# EAGLE board ponte_ampli_V1.3 (EAGLE 4.09)
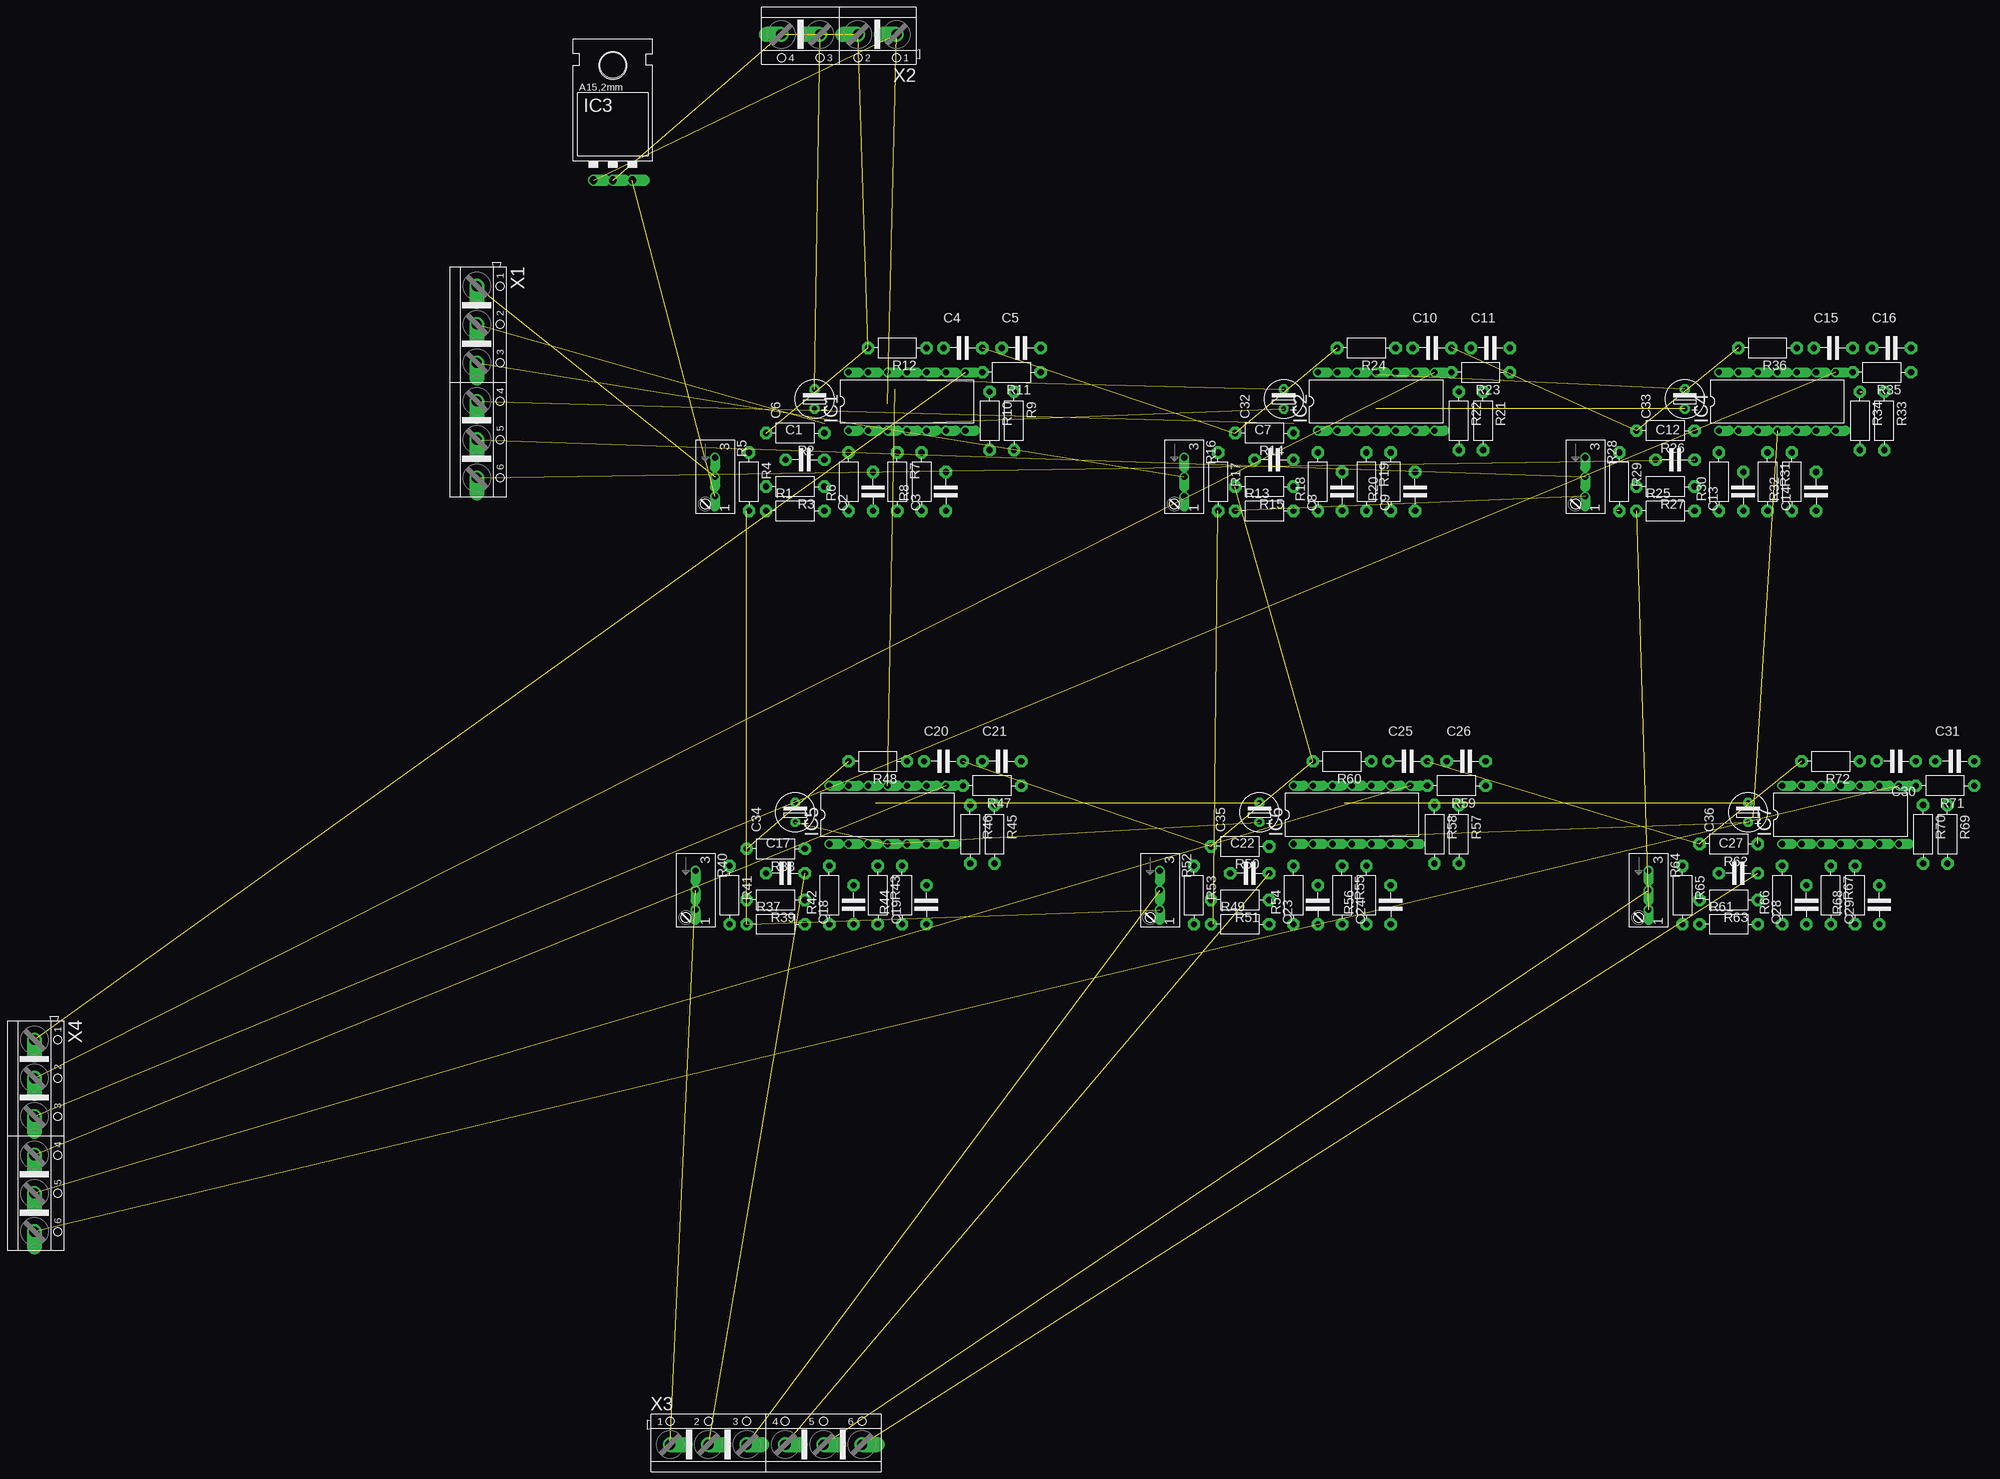
[diagram p0: board, top side]
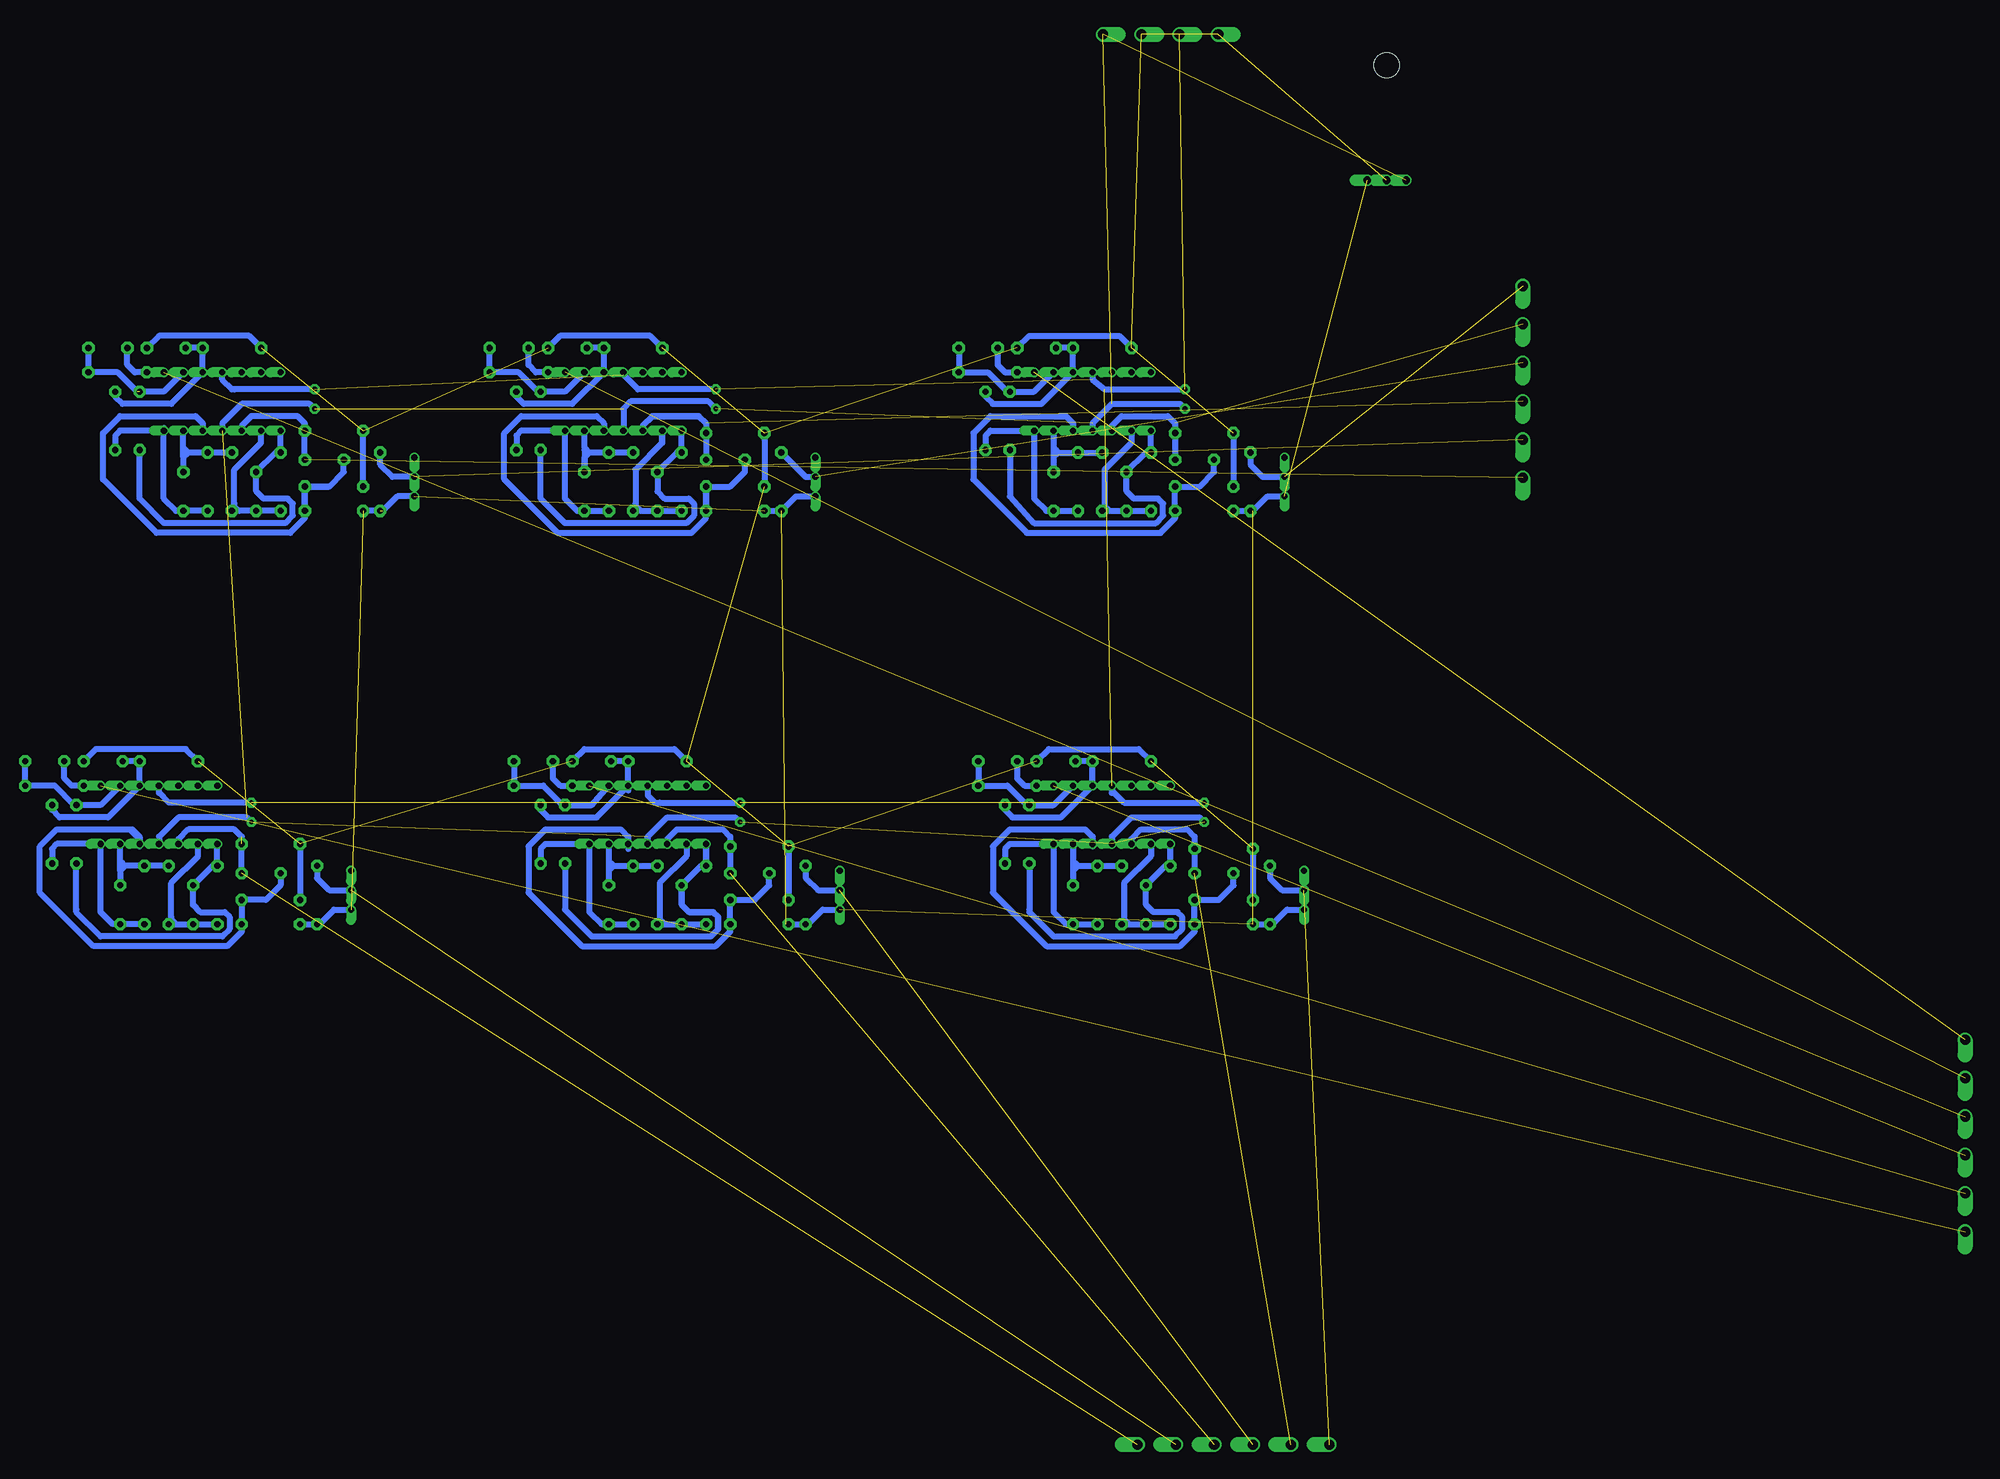
[diagram p1: board, bottom side, seen from below]

No outline drawn. Coordinates in mm, seen from the top.
Copper layers used: Bottom

## Footprints (pad centres in the part's own frame; a part is rotated, then mirrored left to right if it is on the bottom)
C-5 = drill 0.813 pad 1.6 octagon: 1 -2.54,0; 2 2.54,0
ES-2,5L = drill 0.61 pad 1.27 octagon: 1 0,0; 2 2.54,0
DIL14 = drill 0.813 offset: 1 -7.62,-3.81; 2 -5.08,-3.81; 3 -2.54,-3.81; 4 0,-3.81; 5 2.54,-3.81; 6 5.08,-3.81; 7 7.62,-3.81; 8 7.62,3.81; 9 5.08,3.81; 10 2.54,3.81; 11 0,3.81; 12 -2.54,3.81; 13 -5.08,3.81; 14 -7.62,3.81
78XXL = drill 1.016 offset: GND 0,-3.81; IN -2.54,-3.81; OUT 2.54,-3.81 | hole 3.302: 0,11.176
R-7,5 = drill 0.813 pad 1.6 octagon: 1 -3.81,0; 2 3.81,0
S64W = drill 0.813 offset: A 2.54,1.27; E -2.54,1.27; S 0,1.27
AK500/6 = drill 1.321 offset: 1 -12.522,0; 2 -7.518,0; 3 -2.515,0; 4 2.515,0; 5 7.518,0; 6 12.522,0
AK500/4 = drill 1.321 offset: 1 -7.518,0; 2 -2.489,0; 3 2.489,0; 4 7.518,0

## Placement (x,y rotation side)
C1  [C-5]  -44.77,-26.99 0 top
C2  [C-5]  -35.88,-31.11 90 top
C3  [C-5]  -26.35,-31.11 90 top
C4  [C-5]  -24.13,-12.38 0 top
C5  [C-5]  -16.51,-12.38 0 top
C6  [ES-2,5L]  -43.5,-20.32 90 top
C7  [C-5]  16.51,-26.99 0 top
C8  [C-5]  25.4,-31.11 90 top
C9  [C-5]  34.92,-31.11 90 top
C10  [C-5]  37.15,-12.38 0 top
C11  [C-5]  44.77,-12.38 0 top
C12  [C-5]  68.9,-26.99 0 top
C13  [C-5]  77.79,-31.11 90 top
C14  [C-5]  87.31,-31.11 90 top
C15  [C-5]  89.53,-12.38 0 top
C16  [C-5]  97.16,-12.38 0 top
C17  [C-5]  -47.31,-80.96 0 top
C18  [C-5]  -38.42,-85.09 90 top
C19  [C-5]  -28.89,-85.09 90 top
C20  [C-5]  -26.67,-66.36 0 top
C21  [C-5]  -19.05,-66.36 0 top
C22  [C-5]  13.34,-80.96 0 top
C23  [C-5]  22.23,-85.09 90 top
C24  [C-5]  31.75,-85.09 90 top
C25  [C-5]  33.97,-66.36 0 top
C26  [C-5]  41.59,-66.36 0 top
C27  [C-5]  77.15,-80.96 0 top
C28  [C-5]  86.04,-85.09 90 top
C29  [C-5]  95.57,-85.09 90 top
C30  [C-5]  97.79,-66.36 180 top
C31  [C-5]  105.41,-66.36 0 top
C32  [ES-2,5L]  17.78,-20.32 90 top
C33  [ES-2,5L]  70.17,-20.32 90 top
C34  [ES-2,5L]  -46.04,-74.3 90 top
C35  [ES-2,5L]  14.61,-74.3 90 top
C36  [ES-2,5L]  78.42,-74.3 90 top
IC1  TL084P  [DIL14]  -31.43,-19.37 0 top
IC2  TL084P  [DIL14]  29.84,-19.37 0 top
IC3  7805  [78XXL]  -69.85,13.34 0 top
IC4  TL084P  [DIL14]  82.23,-19.37 0 top
IC5  TL084P  [DIL14]  -33.97,-73.34 0 top
IC6  TL084P  [DIL14]  26.67,-73.34 0 top
IC7  TL084P  [DIL14]  90.49,-73.34 0 top
R1  [R-7,5]  -46.04,-33.66 0 top
R2  [R-7,5]  -46.04,-23.5 180 top
R3  [R-7,5]  -46.04,-30.48 180 top
R4  [R-7,5]  -52.07,-29.84 270 top
R5  [S64W]  -57.78,-29.21 270 top
R6  [R-7,5]  -39.05,-29.84 90 top
R7  [R-7,5]  -32.7,-29.84 270 top
R8  [R-7,5]  -29.53,-29.84 90 top
R9  [R-7,5]  -17.46,-21.91 270 top
R10  [R-7,5]  -20.64,-21.91 270 top
R11  [R-7,5]  -17.78,-15.56 180 top
R12  [R-7,5]  -32.7,-12.38 180 top
R13  [R-7,5]  15.24,-33.66 0 top
R14  [R-7,5]  15.24,-23.5 180 top
R15  [R-7,5]  15.24,-30.48 180 top
R16  [S64W]  3.49,-29.21 270 top
R17  [R-7,5]  9.21,-29.84 270 top
R18  [R-7,5]  22.23,-29.84 90 top
R19  [R-7,5]  28.57,-29.84 270 top
R20  [R-7,5]  31.75,-29.84 90 top
R21  [R-7,5]  43.81,-21.91 270 top
R22  [R-7,5]  40.64,-21.91 270 top
R23  [R-7,5]  43.5,-15.56 180 top
R24  [R-7,5]  28.57,-12.38 180 top
R25  [R-7,5]  67.63,-33.66 0 top
R26  [R-7,5]  67.63,-23.18 180 top
R27  [R-7,5]  67.63,-30.48 180 top
R28  [S64W]  55.88,-29.21 270 top
R29  [R-7,5]  61.59,-29.84 270 top
R30  [R-7,5]  74.61,-29.84 90 top
R31  [R-7,5]  80.96,-29.84 270 top
R32  [R-7,5]  84.14,-29.84 90 top
R33  [R-7,5]  96.2,-21.91 270 top
R34  [R-7,5]  93.03,-21.91 270 top
R35  [R-7,5]  95.89,-15.56 180 top
R36  [R-7,5]  80.96,-12.38 180 top
R37  [R-7,5]  -48.58,-87.63 0 top
R38  [R-7,5]  -48.58,-77.79 180 top
R39  [R-7,5]  -48.58,-84.45 180 top
R40  [S64W]  -60.33,-83.19 270 top
R41  [R-7,5]  -54.61,-83.82 270 top
R42  [R-7,5]  -41.59,-83.82 90 top
R43  [R-7,5]  -35.24,-83.82 270 top
R44  [R-7,5]  -32.07,-83.82 90 top
R45  [R-7,5]  -20,-75.88 270 top
R46  [R-7,5]  -23.18,-75.88 270 top
R47  [R-7,5]  -20.32,-69.53 180 top
R48  [R-7,5]  -35.24,-66.36 180 top
R49  [R-7,5]  12.06,-87.63 0 top
R50  [R-7,5]  12.06,-77.47 180 top
R51  [R-7,5]  12.06,-84.45 180 top
R52  [S64W]  0.32,-83.19 270 top
R53  [R-7,5]  6.03,-83.82 270 top
R54  [R-7,5]  19.05,-83.82 90 top
R55  [R-7,5]  25.4,-83.82 270 top
R56  [R-7,5]  28.57,-83.82 90 top
R57  [R-7,5]  40.64,-75.88 270 top
R58  [R-7,5]  37.47,-75.88 270 top
R59  [R-7,5]  40.32,-69.53 180 top
R60  [R-7,5]  25.4,-66.36 180 top
R61  [R-7,5]  75.88,-87.63 0 top
R62  [R-7,5]  75.88,-77.15 180 top
R63  [R-7,5]  75.88,-84.45 180 top
R64  [S64W]  64.14,-83.19 270 top
R65  [R-7,5]  69.85,-83.82 270 top
R66  [R-7,5]  82.87,-83.82 90 top
R67  [R-7,5]  89.22,-83.82 270 top
R68  [R-7,5]  92.39,-83.82 90 top
R69  [R-7,5]  104.46,-75.88 270 top
R70  [R-7,5]  101.28,-75.88 270 top
R71  [R-7,5]  104.14,-69.53 180 top
R72  [R-7,5]  89.22,-66.36 180 top
X1  [AK500/6]  -87.63,-16.83 270 top
X2  [AK500/4]  -40.32,28.57 180 top
X3  [AK500/6]  -49.85,-155.57 0 top
X4  [AK500/6]  -145.41,-115.25 270 top

## Library data of the parts
C1-C36 R1-R4 R6-R15 R17-R27 R29-R39 R41-R51 R53-R63 R65-R72 = discrete
IC1 IC2 IC4-IC7 = linear
IC3 = v-reg
R5 R16 R28 R40 R52 R64 = pot
X1-X4 = con-ptr500

## Nets
+5V: IC3.OUT R1.1 R4.2 R5.A R13.1 R16.A R17.2 R25.1 R28.A R29.2 R37.1 R40.A R41.2 R49.1 R52.A R53.2 R61.1 R64.A R65.2
+12V: C6.1 C32.1 C33.1 C34.1 C35.1 C36.1 IC1.4 IC2.4 IC3.IN IC4.4 IC5.4 IC6.4 IC7.4 X2.1
-12V: C6.2 C32.2 C33.2 C34.2 C35.2 C36.2 IC1.11 IC2.11 IC4.11 IC5.11 IC6.11 IC7.11 X2.3
N$1: C1.1 IC1.5 R1.2 R3.1
N$2: C1.2 IC1.3 R2.1 X1.2
N$3: C5.2 IC1.9 R10.1 R11.1
N$4: C2.2 IC1.1 R6.2 R10.2
N$5: R4.1 R5.S X1.1
N$6: C4.1 IC1.10 R9.1 R12.1
N$7: C2.1 IC1.2 R6.1 R7.2
N$8: C11.1 IC2.8 R23.2 X4.2
N$9: C3.1 IC1.7 R8.1 R9.2
N$10: C7.1 IC2.5 R13.2 R15.1
N$11: C7.2 IC2.3 R14.1 X1.4
N$12: R16.S R17.1 X1.3
N$13: C8.2 IC2.1 R18.2 R22.2
N$14: C8.1 IC2.2 R18.1 R19.2
N$15: C3.2 IC1.6 R7.1 R8.2
N$16: C9.1 IC2.7 R20.1 R21.2
N$17: C11.2 IC2.9 R22.1 R23.1
N$18: C10.1 IC2.10 R21.1 R24.1
N$19: C9.2 IC2.6 R19.1 R20.2
N$20: C12.1 IC4.5 R25.2 R27.1
N$21: C12.2 IC4.3 R26.1 X1.6
N$22: R28.S R29.1 X1.5
N$23: C13.2 IC4.1 R30.2 R34.2
N$24: C13.1 IC4.2 R30.1 R31.2
N$25: C14.1 IC4.7 R32.1 R33.2
N$26: C16.2 IC4.9 R34.1 R35.1
N$27: C15.1 IC4.10 R33.1 R36.1
N$28: C14.2 IC4.6 R31.1 R32.2
N$29: C17.1 IC5.5 R37.2 R39.1
N$30: C17.2 IC5.3 R38.1 X3.2
N$31: R40.S R41.1 X3.1
N$32: C18.2 IC5.1 R42.2 R46.2
N$33: C18.1 IC5.2 R42.1 R43.2
N$34: C19.1 IC5.7 R44.1 R45.2
N$35: C21.2 IC5.9 R46.1 R47.1
N$36: C20.1 IC5.10 R45.1 R48.1
N$37: C19.2 IC5.6 R43.1 R44.2
N$38: C22.1 IC6.5 R49.2 R51.1
N$39: C22.2 IC6.3 R50.1 X3.4
N$40: R52.S R53.1 X3.3
N$41: C23.2 IC6.1 R54.2 R58.2
N$42: C23.1 IC6.2 R54.1 R55.2
N$43: C24.1 IC6.7 R56.1 R57.2
N$44: C26.2 IC6.9 R58.1 R59.1
N$45: C25.1 IC6.10 R57.1 R60.1
N$46: C24.2 IC6.6 R55.1 R56.2
N$47: C27.1 IC7.5 R61.2 R63.1
N$48: C27.2 IC7.3 R62.1 X3.6
N$49: R64.S R65.1 X3.5
N$50: C28.2 IC7.1 R66.2 R70.2
N$51: C28.1 IC7.2 R66.1 R67.2
N$52: C29.1 IC7.7 R68.1 R69.2
N$53: C31.2 IC7.9 R70.1 R71.1
N$54: C30.2 IC7.10 R69.1 R72.1
N$55: C29.2 IC7.6 R67.1 R68.2
N$56: C16.1 IC4.8 R35.2 X4.3
N$57: C5.1 IC1.8 R11.2 X4.1
N$58: C31.1 IC7.8 R71.2 X4.6
N$59: C26.1 IC6.8 R59.2 X4.5
N$60: C21.1 IC5.8 R47.2 X4.4
PE: C4.2 C10.2 C15.2 C20.2 C25.2 C30.1 IC3.GND R2.2 R3.2 R12.2 R14.2 R15.2 R24.2 R26.2 R27.2 R36.2 R38.2 R39.2 R48.2 R50.2 R51.2 R60.2 R62.2 R63.2 R72.2 X2.2 X2.4

## Tracks (layer width: path | path; a pad name or v marks a point on that pad's centre or on a via)
+5V  (7 unrouted)
  Bottom 0.813: R1.1 R4.2 -52.39,-33.66 -54.29,-31.75 R5.A | R16.A 7.3,-31.75 R17.2 R13.1 | R28.A 59.37,-31.75 61.28,-33.66 | R29.2 R25.1 | R37.1 R41.2 -54.93,-87.63 -56.83,-85.72 R40.A | R52.A 3.81,-85.72 5.71,-87.63 R53.2 R49.1 8.57,-87.63 | R64.A 67.63,-85.72 69.53,-87.63 R65.2 R61.1
+5V1
  Bottom 0.813: 4.76,-31.75 7.3,-31.75 9.21,-33.66 11.43,-33.66
+5V2
  Bottom 0.813: 63.82,-33.66 61.28,-33.66 59.37,-31.75 57.15,-31.75
+5V3
  Bottom 0.813: -52.39,-87.63 -54.61,-87.63 -54.93,-87.63 -56.83,-85.72 -59.05,-85.72
+5V4
  Bottom 0.813: 8.26,-87.63 5.71,-87.63 3.81,-85.72 1.59,-85.72
+5V5
  Bottom 0.813: 72.07,-87.63 69.53,-87.63 67.63,-85.72 65.41,-85.72
+12V  (8 unrouted)
  Bottom 0.813: IC1.4 -31.43,-22.23 -33.97,-19.68 -42.86,-19.68 C6.1 | C32.1 18.73,-19.37 28.89,-19.37 29.84,-20.32 IC2.4 | C33.1 70.8,-19.68 79.69,-19.68 82.23,-22.23 IC4.4 | IC7.4 90.49,-76.2 87.95,-73.66 79.06,-73.66 C36.1 | IC6.4 26.67,-76.2 24.13,-73.66 15.24,-73.66 C35.1
+12V2
  Bottom 0.813: 82.23,-23.18 82.23,-22.23 79.69,-19.68 70.8,-19.68 70.17,-20.32
+12V3
  Bottom 0.813: -33.97,-77.15 -33.97,-76.2 -36.51,-73.66 -45.4,-73.66 -46.04,-74.3
+12V4
  Bottom 0.813: 26.67,-77.15 26.67,-76.2 24.13,-73.66 15.24,-73.66 14.61,-74.3
+12V5
  Bottom 0.813: 90.49,-77.15 90.49,-76.2 87.95,-73.66 79.06,-73.66 78.42,-74.3
-12V  (6 unrouted)
  Bottom 0.813: C6.2 -33.02,-17.78 -31.43,-16.51 IC1.11 | IC2.11 29.84,-15.88 27.94,-17.78 C32.2 | C33.2 80.96,-17.78 82.23,-16.51 IC4.11 | IC7.11 90.49,-70.48 89.22,-71.75 C36.2 | C34.2 -35.56,-71.75 -33.97,-70.17 IC5.11 | C35.2 25.72,-71.75 26.67,-70.8 IC6.11
-12V2
  Bottom 0.813: 70.17,-17.78 80.64,-17.78
-12V3
  Bottom 0.813: -35.56,-71.75 -46.04,-71.75
-12V4
  Bottom 0.813: 25.08,-71.75 14.61,-71.75
-12V5
  Bottom 0.813: 78.42,-71.75 88.9,-71.75
N$1
  Bottom 0.813: IC1.5 -28.89,-22.23 -27.94,-21.27 -18.1,-21.27 -15.88,-23.5 -15.88,-29.53 -22.86,-36.51 -40.32,-36.51 -42.23,-34.61 R1.2 R3.1 -45.4,-30.48 -47.31,-28.57 C1.1
N$2  (1 unrouted)
  Bottom 0.813: C1.2 R2.1 -42.23,-22.23 -41.27,-21.27 -35.24,-21.27 -33.97,-22.54 IC1.3
N$3
  Bottom 0.813: C5.2 R11.1 -17.78,-15.56 -20.32,-18.1 R10.1 -23.81,-18.1 IC1.9
N$4
  Bottom 0.813: R6.2 -39.05,-26.35 | R6.2 IC1.1 | R6.2 -38.42,-26.04 C2.2 -35.88,-31.11 -36.83,-32.07 -40.01,-32.07 -40.64,-32.7 -40.64,-34.29 -39.69,-35.24 -23.81,-35.24 -20.64,-31.75 R10.2
N$5  (1 unrouted)
  Bottom 0.813: R4.1 -52.07,-27.62 -53.66,-29.21 R5.S
N$6
  Bottom 0.813: C4.1 R12.1 IC1.10 -24.77,-19.68 -18.41,-19.68 -17.46,-18.73 R9.1
N$7
  Bottom 0.813: R6.1 C2.1 -33.66,-33.66 | IC1.2 -36.51,-24.77 -33.02,-28.26 -33.02,-32.7 | -33.02,-32.7 -33.02,-33.34 R7.2 -33.66,-33.66 | -33.02,-32.7 -33.02,-33.02 -33.66,-33.66
N$8  (1 unrouted)
  Bottom 0.813: R23.2 IC2.8 R23.2 | C11.1 42.23,-14.61 41.27,-15.56 R23.2
N$9
  Bottom 0.813: R8.1 C3.1 -25.4,-33.66 -23.81,-32.07 IC1.7 -18.1,-23.18 -17.46,-23.81 R9.2
N$10
  Bottom 0.813: R15.1 R13.2 | R15.1 15.88,-30.48 13.97,-28.57 C7.1 | R15.1 19.05,-34.61 20.95,-36.51 38.42,-36.51 45.4,-29.53 45.4,-23.5 43.18,-21.27 33.34,-21.27 32.38,-22.23 IC2.5
N$11  (1 unrouted)
  Bottom 0.813: C7.2 R14.1 19.05,-22.23 20,-21.27 26.04,-21.27 27.3,-22.54 IC2.3
N$12  (1 unrouted)
  Bottom 0.813: R16.S 6.03,-29.21 R17.1
N$13
  Bottom 0.813: IC2.1 R18.2 22.86,-26.04 C8.2 25.4,-31.11 24.45,-32.07 21.27,-32.07 20.64,-32.7 20.64,-34.29 21.59,-35.24 26.67,-35.24 26.99,-35.24 37.47,-35.24 40.64,-32.07 R22.2
N$14
  Bottom 0.813: R18.1 C8.1 25.72,-33.66 27.62,-33.66 | 27.62,-33.66 28.26,-33.02 28.26,-28.26 24.77,-24.77 IC2.2 | 27.62,-33.66 R19.2
N$15
  Bottom 0.813: R7.1 R8.2 -26.99,-26.04 | IC1.6 -26.35,-25.4 | -26.35,-26.67 C3.2 | -26.35,-26.67 -26.99,-26.04 | -26.35,-25.4 -26.35,-26.67 | -26.35,-25.4 -26.35,-25.72 -26.67,-26.04 -26.67,-25.72 -26.35,-25.4 | -26.35,-25.4 -26.99,-26.04
N$16
  Bottom 0.813: C9.1 R20.1 C9.1 | C9.1 35.88,-33.66 37.47,-32.07 IC2.7 43.18,-23.18 43.81,-23.81 R21.2
N$17
  Bottom 0.813: IC2.9 37.47,-18.1 R22.1 40.96,-18.1 43.5,-15.56 R23.1 C11.2
N$18
  Bottom 0.813: R21.1 43.81,-18.73 42.86,-19.68 36.51,-19.68 IC2.10 R24.1 | R24.1 C10.1 R24.1
N$19
  Bottom 0.813: R19.1 R20.2 34.29,-26.04 34.92,-25.4 | 34.92,-25.4 IC2.6 | 34.92,-25.4 C9.2
N$20
  Bottom 0.813: C12.1 66.36,-28.57 68.26,-30.48 R27.1 | R27.1 R25.2 | R27.1 71.44,-34.61 73.34,-36.51 90.81,-36.51 97.79,-29.53 97.79,-23.5 95.57,-21.27 85.72,-21.27 84.77,-22.23 IC4.5
N$21  (1 unrouted)
  Bottom 0.813: R26.1 C12.2 R26.1 | R26.1 71.44,-22.23 72.39,-21.27 78.42,-21.27 79.69,-22.54 IC4.3
N$22  (1 unrouted)
  Bottom 0.813: R28.S 60.01,-29.21 61.59,-27.62 R29.1
N$23
  Bottom 0.813: IC4.1 R30.2 75.25,-26.04 C13.2 77.79,-31.11 76.83,-32.07 73.66,-32.07 73.03,-32.7 73.03,-34.29 73.98,-35.24 89.85,-35.24 93.03,-32.07 R34.2
N$24
  Bottom 0.813: R30.1 C13.1 80.01,-33.66 80.64,-33.02 | 80.64,-33.02 80.64,-28.26 77.15,-24.77 IC4.2 | 80.64,-33.02 80.64,-33.34 R31.2
N$25
  Bottom 0.813: IC4.7 89.85,-22.86 | IC4.7 89.85,-32.07 88.27,-33.66 C14.1 R32.1 | IC4.7 95.57,-23.18 96.2,-23.81 R33.2
N$26  (1 unrouted)
  Bottom 0.813: C16.2 R35.1 95.89,-15.56 93.34,-18.1 89.85,-18.1 IC4.9
N$27
  Bottom 0.813: C15.1 R36.1 IC4.10 88.9,-19.68 95.25,-19.68 96.2,-18.73 R33.1
N$28
  Bottom 0.813: 87.31,-26.67 IC4.6 | R31.1 R32.2 86.36,-26.04 86.68,-26.04 87.31,-26.67 | 87.31,-26.67 C14.2
N$29
  Bottom 0.813: C17.1 -49.85,-82.55 -47.94,-84.45 R39.1 R37.2 -44.77,-88.58 -42.86,-90.49 -25.4,-90.49 -18.41,-83.5 -18.41,-77.47 -20.64,-75.25 -30.48,-75.25 -31.43,-76.2 IC5.5 -31.43,-77.47
N$30  (1 unrouted)
  Bottom 0.813: C17.2 R38.1 -44.77,-76.2 -43.81,-75.25 -37.78,-75.25 -36.51,-76.52 IC5.3
N$31  (1 unrouted)
  Bottom 0.813: R40.S -56.2,-83.19 -54.61,-81.6 R41.1
N$32
  Bottom 0.813: IC5.1 R42.2 -40.96,-80.01 C18.2 -38.42,-85.09 -39.37,-86.04 -42.55,-86.04 -43.18,-86.68 -43.18,-88.27 -42.23,-89.22 -26.35,-89.22 -23.18,-86.04 R46.2
N$33
  Bottom 0.813: C18.1 R42.1 C18.1 | -35.56,-87.63 -35.56,-82.23 -39.05,-78.74 IC5.2 -39.05,-76.83 | -35.56,-87.63 R43.2 | C18.1 -38.1,-87.63 -35.56,-87.63
N$34
  Bottom 0.813: R44.1 C19.1 -28.26,-87.63 -27.94,-87.63 -26.35,-86.04 IC5.7 -20.64,-77.15 -20,-77.79 R45.2
N$35
  Bottom 0.813: -23.5,-72.07 R46.1 | -23.5,-72.07 -22.86,-72.07 -20.32,-69.53 R47.1 C21.2 | -23.5,-72.07 -26.35,-72.07 IC5.9
N$36
  Bottom 0.813: R45.1 -20,-72.71 -20.95,-73.66 -27.3,-73.66 IC5.10 R48.1 C20.1
N$37
  Bottom 0.813: -29.21,-80.01 R44.2 | R44.2 R43.1 R44.2 | -29.21,-80.01 -29.21,-79.69 -28.89,-79.38 IC5.6 | C19.2 -28.89,-80.33 -29.21,-80.01
N$38
  Bottom 0.813: C22.1 10.79,-82.55 12.7,-84.45 R51.1 R49.2 15.88,-88.58 17.78,-90.49 35.24,-90.49 42.23,-83.5 42.23,-77.47 40.01,-75.25 30.16,-75.25 29.21,-76.2 IC6.5 29.21,-77.79
N$39  (1 unrouted)
  Bottom 0.813: IC6.3 24.13,-76.52 22.86,-75.25 16.83,-75.25 15.88,-76.2 R50.1 C22.2
N$40  (1 unrouted)
  Bottom 0.813: R52.S 4.45,-83.19 6.03,-81.6 R53.1
N$41
  Bottom 0.813: IC6.1 R54.2 19.68,-80.01 C23.2 22.23,-85.09 21.27,-86.04 18.1,-86.04 17.46,-86.68 17.46,-88.27 18.41,-89.22 33.97,-89.22 37.47,-85.72 R58.2
N$42
  Bottom 0.813: IC6.2 21.59,-78.74 25.08,-82.23 25.08,-87.63 | R54.1 C23.1 25.08,-87.63 | 25.08,-87.63 R55.2
N$43
  Bottom 0.813: R56.1 C24.1 32.7,-87.63 34.29,-86.04 IC6.7 40.01,-77.15 40.64,-77.79 R57.2
N$44
  Bottom 0.813: IC6.9 33.97,-72.07 R58.1 37.78,-72.07 40.32,-69.53 R59.1 C26.2
N$45
  Bottom 0.813: R57.1 40.64,-72.71 39.69,-73.66 33.34,-73.66 IC6.10 | IC6.10 29.21,-70.17 | IC6.10 R60.1 C25.1
N$46
  Bottom 0.813: R55.1 R56.2 31.43,-80.01 | 31.43,-80.01 31.75,-79.69 IC6.6 | 31.43,-80.01 31.75,-80.33 C24.2
N$47
  Bottom 0.813: R63.1 R61.2 | R63.1 76.52,-84.45 74.61,-82.55 C27.1 | R63.1 79.69,-88.58 81.6,-90.49 99.06,-90.49 106.05,-83.5 106.05,-77.47 103.82,-75.25 94.3,-75.25 93.03,-76.52 IC7.5 93.03,-77.47
N$48  (2 unrouted)
  Bottom 0.813: C27.2 79.69,-76.2 80.64,-75.25 86.68,-75.25 87.95,-76.52 IC7.3
N$49  (1 unrouted)
  Bottom 0.813: R65.1 69.85,-81.6 68.26,-83.19 R64.S
N$50
  Bottom 0.813: IC7.1 R66.2 83.5,-80.01 C28.2 86.04,-85.09 85.09,-86.04 81.92,-86.04 81.28,-86.68 81.28,-88.27 82.23,-89.22 98.11,-89.22 101.28,-86.04 R70.2
N$51
  Bottom 0.813: C28.1 R66.1 C28.1 | 88.27,-87.63 88.9,-87 88.9,-82.23 85.41,-78.74 IC7.2 | 88.27,-87.63 C28.1 | 88.27,-87.63 88.58,-87.63 R67.2
N$52
  Bottom 0.813: R68.1 C29.1 96.2,-87.63 96.52,-87.63 98.11,-86.04 IC7.7 103.82,-77.15 104.46,-77.79 R69.2
N$53
  Bottom 0.813: IC7.9 98.11,-72.07 R70.1 101.6,-72.07 104.14,-69.53 R71.1 C31.2
N$54
  Bottom 0.813: R69.1 104.46,-72.71 103.5,-73.66 97.16,-73.66 IC7.10 R72.1 C30.2
N$55
  Bottom 0.813: R67.1 R68.2 95.25,-80.01 | 95.25,-80.01 95.25,-79.69 95.57,-79.38 IC7.6 | C29.2 95.57,-80.33 95.25,-80.01
N$56  (1 unrouted)
  Bottom 0.813: IC4.8 R35.2 | C16.1 94.61,-14.61 93.66,-15.56 R35.2 | IC4.8 R35.2 | IC4.8 R35.2
N$57  (1 unrouted)
  Bottom 0.813: IC1.8 R11.2 -20,-15.56 -19.05,-14.61 C5.1
N$58  (1 unrouted)
  Bottom 0.813: IC7.8 R71.2 101.92,-69.53 102.87,-68.58 C31.1
N$59  (1 unrouted)
  Bottom 0.813: R59.2 IC6.8 R59.2 | C26.1 39.05,-68.58 38.1,-69.53 R59.2
N$60  (1 unrouted)
  Bottom 0.813: IC5.8 R47.2 -22.54,-69.53 -21.59,-68.58 C21.1
N$61
  Bottom 0.813: 32.38,-23.18 32.38,-22.23 33.34,-21.27 43.18,-21.27 45.4,-23.5 45.4,-29.53 38.42,-36.51 20.95,-36.51 19.05,-34.61 19.05,-30.48
N$62
  Bottom 0.813: 27.3,-23.18 27.3,-22.54 26.04,-21.27 20,-21.27 19.05,-22.23 19.05,-26.99
N$64
  Bottom 0.813: 20.64,-32.7 20.64,-34.29 21.59,-35.24
N$65
  Bottom 0.813: 27.62,-33.66 22.23,-33.66 | 27.62,-33.66 28.57,-33.66 28.26,-33.34 28.26,-32.7 | 27.62,-33.66 28.26,-33.02 28.26,-32.7 | 28.26,-28.26 28.26,-32.7
N$66
  Bottom 0.813: 31.75,-33.66 35.88,-33.66 37.47,-32.07 37.47,-23.18 43.18,-23.18 43.81,-23.81 43.81,-25.72
N$67
  Bottom 0.813: 24.77,-24.77 24.77,-23.18
N$68
  Bottom 0.813: 34.61,-12.38 32.38,-12.38 32.38,-15.56 36.51,-19.68 42.86,-19.68 43.81,-18.73 43.81,-18.1
N$69
  Bottom 0.813: 34.92,-25.4 34.92,-23.18 | 34.92,-28.57 34.92,-26.67 34.29,-26.04 34.92,-25.4 | 34.92,-25.4 34.92,-25.72 34.61,-26.04 34.61,-25.72 34.92,-25.4
N$70
  Bottom 0.813: 82.23,-16.51 82.23,-15.56
N$71
  Bottom 0.813: 84.77,-23.18 84.77,-22.23 85.72,-21.27 95.57,-21.27 97.79,-23.5 97.79,-29.53 90.81,-36.51 73.34,-36.51 71.44,-34.61 71.44,-30.48 68.26,-30.48 66.36,-28.57 66.36,-26.99
N$72
  Bottom 0.813: 79.69,-23.18 79.69,-22.54 78.42,-21.27 72.39,-21.27 71.44,-22.23 71.44,-26.99
N$73
  Bottom 0.813: 61.59,-26.04 61.59,-27.62 60.01,-29.21 57.15,-29.21
N$74
  Bottom 0.813: 74.61,-26.04 74.61,-26.35 | 74.61,-26.04 74.61,-23.18 | 74.61,-26.04 75.25,-26.04 77.79,-28.57 77.79,-31.11 76.83,-32.07 73.66,-32.07 73.03,-32.7 73.03,-34.29 73.98,-35.24 89.85,-35.24
N$75
  Bottom 0.813: 77.15,-23.18 77.15,-24.77 80.64,-28.26 80.64,-32.7 | 80.64,-32.7 80.64,-33.34 80.96,-33.66 80.01,-33.66 | 74.61,-33.66 80.01,-33.66 | 80.64,-32.7 80.64,-33.02 80.01,-33.66
N$76
  Bottom 0.813: 84.14,-33.66 88.27,-33.66 89.85,-32.07 89.85,-23.18 95.57,-23.18 96.2,-23.81 96.2,-25.72
N$77
  Bottom 0.813: 99.69,-12.38 99.69,-15.56 95.89,-15.56 93.34,-18.1 89.85,-18.1 87.31,-15.56
N$78
  Bottom 0.813: 87,-12.38 84.77,-12.38 84.77,-15.56 88.9,-19.68 95.25,-19.68 96.2,-18.73 96.2,-18.1
N$79
  Bottom 0.813: 87.31,-25.4 87.31,-23.18 | 87.31,-26.67 87.31,-28.57 | 80.96,-26.04 86.68,-26.04 | 86.68,-26.04 87.31,-26.67 | 87.31,-26.67 87.31,-25.4 | 87.31,-25.4 87.31,-25.72 87,-26.04 87,-25.72 87.31,-25.4 | 86.68,-26.04 87.31,-25.4
N$80
  Bottom 0.813: 94.61,-12.38 94.61,-14.61 93.66,-15.56 89.85,-15.56
N$81
  Bottom 0.813: -31.43,-77.15 -31.43,-76.2 -30.48,-75.25 -20.64,-75.25 -18.41,-77.47 -18.41,-83.5 -25.4,-90.49 -42.86,-90.49 -44.77,-88.58 -44.77,-87.63 -44.77,-84.45 -47.94,-84.45 -49.85,-82.55 -49.85,-80.96
N$82
  Bottom 0.813: -44.77,-80.96 -44.77,-77.79 -44.77,-76.2 -43.81,-75.25 -37.78,-75.25 -36.51,-76.52 -36.51,-77.15
N$83
  Bottom 0.813: -54.61,-80.01 -54.61,-81.6 -56.2,-83.19 -59.05,-83.19
N$84
  Bottom 0.813: -41.59,-80.01 -41.59,-80.33 | -41.59,-80.01 -41.59,-77.15 | -41.59,-80.01 -40.96,-80.01 -38.42,-82.55 -38.42,-85.09 -39.37,-86.04 -42.55,-86.04 -43.18,-86.68 -43.18,-88.27 -42.23,-89.22 -26.35,-89.22
N$85
  Bottom 0.813: -41.59,-87.63 -38.42,-87.63 -36.2,-87.63 | -39.05,-77.15 -39.05,-78.74 -35.56,-82.23 -35.56,-86.68 | -35.56,-86.68 -35.56,-87.31 -35.24,-87.63 -36.2,-87.63 | -35.56,-86.68 -35.56,-87 -36.2,-87.63
N$86
  Bottom 0.813: -32.07,-87.63 -28.89,-87.63 -27.94,-87.63 -26.35,-86.04 -26.35,-77.15 -20.64,-77.15 -20,-77.79 -20,-79.69
N$87
  Bottom 0.813: -16.51,-66.36 -16.51,-69.53 -20.32,-69.53 -22.86,-72.07 -23.18,-72.07 -26.35,-72.07 -28.89,-69.53
N$88
  Bottom 0.813: -29.21,-66.36 -31.43,-66.36 -31.43,-69.53 -27.3,-73.66 -20.95,-73.66 -20,-72.71 -20,-72.07
N$89
  Bottom 0.813: -35.24,-80.01 -32.07,-80.01 -29.53,-80.01 | -28.89,-77.15 -28.89,-79.38 | -28.89,-80.64 -28.89,-82.55 | -28.89,-80.64 -29.53,-80.01 | -28.89,-79.38 -28.89,-80.64 | -28.89,-79.38 -28.89,-79.69 -29.21,-80.01 -29.21,-79.69 -28.89,-79.38 | -28.89,-79.38 -29.53,-80.01
N$90
  Bottom 0.813: -26.35,-69.53 -24.13,-69.53 -22.54,-69.53 -21.59,-68.58 -21.59,-66.36
N$91
  Bottom 0.813: 29.21,-77.15 29.21,-76.2 30.16,-75.25 40.01,-75.25 42.23,-77.47 42.23,-83.5 35.24,-90.49 17.78,-90.49 15.88,-88.58 15.88,-84.45 12.7,-84.45 10.79,-82.55 10.79,-80.96
N$92
  Bottom 0.813: 24.13,-77.15 24.13,-76.52 22.86,-75.25 16.83,-75.25 15.88,-76.2 15.88,-80.96
N$93
  Bottom 0.813: 6.03,-80.01 6.03,-81.6 4.45,-83.19 1.59,-83.19
N$94
  Bottom 0.813: 19.05,-80.01 19.05,-80.33 | 19.05,-77.15 19.05,-80.01 | 19.05,-80.01 19.68,-80.01 22.23,-82.55 22.23,-85.09 21.27,-86.04 18.1,-86.04 17.46,-86.68 17.46,-88.27 18.41,-89.22
N$95
  Bottom 0.813: 21.59,-77.15 21.59,-78.74 25.08,-82.23 25.08,-86.68 | 25.08,-86.68 25.08,-87.31 25.4,-87.63 24.45,-87.63 | 24.45,-87.63 19.05,-87.63 | 25.08,-86.68 25.08,-87 24.45,-87.63
N$96
  Bottom 0.813: 34.29,-86.04 34.29,-77.15 40.01,-77.15 40.64,-77.79 40.64,-79.69
N$97
  Bottom 0.813: 44.13,-66.36 44.13,-69.53 40.32,-69.53 37.78,-72.07 34.29,-72.07
N$98
  Bottom 0.813: 31.43,-66.36 29.21,-66.36 29.21,-69.53 33.34,-73.66 39.69,-73.66 40.64,-72.71 40.64,-72.07
N$99
  Bottom 0.813: 31.75,-77.15 31.75,-79.38 | 31.75,-80.64 31.75,-82.55 | 31.11,-80.01 25.4,-80.01 | 31.75,-80.64 31.11,-80.01 | 31.75,-79.38 31.75,-80.64 | 31.75,-79.38 31.75,-79.69 31.43,-80.01 31.43,-79.69 31.75,-79.38 | 31.75,-79.38 31.11,-80.01
N$100
  Bottom 0.813: 39.05,-66.36 39.05,-68.58 38.1,-69.53 34.29,-69.53
N$101
  Bottom 0.813: 93.03,-77.15 93.03,-76.2 93.98,-75.25 103.82,-75.25 106.05,-77.47 106.05,-83.5 99.06,-90.49 81.6,-90.49 79.69,-88.58 79.69,-84.45 76.52,-84.45 74.61,-82.55 74.61,-80.96
N$102
  Bottom 0.813: 87.95,-77.15 87.95,-76.52 86.68,-75.25 80.64,-75.25 79.69,-76.2 79.69,-80.96
N$103
  Bottom 0.813: 69.85,-80.01 69.85,-81.6 68.26,-83.19 65.41,-83.19
N$104
  Bottom 0.813: 82.87,-80.01 82.87,-80.33 | 82.87,-80.01 82.87,-77.15 | 98.11,-89.22 82.23,-89.22 81.28,-88.27 81.28,-86.68 81.92,-86.04 85.09,-86.04 86.04,-85.09 86.04,-82.55 83.5,-80.01 82.87,-80.01
N$105
  Bottom 0.813: 85.41,-77.15 85.41,-78.74 88.9,-82.23 88.9,-86.68 | 88.9,-86.68 88.9,-87.31 89.22,-87.63 88.27,-87.63 | 88.27,-87.63 82.87,-87.63 | 88.9,-86.68 88.9,-87 88.27,-87.63
N$106
  Bottom 0.813: 92.39,-87.63 96.52,-87.63 98.11,-86.04 98.11,-77.15 103.82,-77.15 104.46,-77.79 104.46,-79.69
N$107
  Bottom 0.813: 107.95,-66.36 107.95,-69.53 104.14,-69.53 101.6,-72.07 98.11,-72.07 95.57,-69.53
N$108
  Bottom 0.813: 95.25,-66.36 93.03,-66.36 93.03,-69.53 97.16,-73.66 103.5,-73.66 104.46,-72.71 104.46,-72.07
N$109
  Bottom 0.813: 95.57,-79.38 95.57,-77.15 | 95.57,-80.64 95.57,-82.55 | 89.22,-80.01 94.93,-80.01 | 94.93,-80.01 95.57,-80.64 | 95.57,-80.64 95.57,-79.38 | 95.57,-79.38 95.57,-79.69 95.25,-80.01 95.25,-79.69 95.57,-79.38 | 94.93,-80.01 95.57,-79.38
N$110
  Bottom 0.813: 102.87,-66.36 102.87,-68.58 101.92,-69.53 98.11,-69.53
N$111
  Bottom 0.813: 22.23,-26.04 22.23,-26.35 | 22.23,-26.04 22.23,-23.18 | 22.86,-26.04 22.23,-26.04
N$112
  Bottom 0.813: 25.4,-31.11 24.45,-32.07
N$113
  Bottom 0.813: 93.03,-31.75 93.03,-25.72
N$114
  Bottom 0.813: 90.49,-70.48 90.49,-69.53
N$115
  Bottom 0.813: 26.67,-69.53 26.67,-70.48
N$116
  Bottom 0.813: -33.97,-69.53 -33.97,-70.48
N$117
  Bottom 0.813: -23.18,-79.69 -23.18,-85.72
N$118
  Bottom 0.813: 32.7,-87.63 28.57,-87.63
N$119
  Bottom 0.813: 37.47,-79.69 37.47,-85.72
N$120
  Bottom 0.813: 101.28,-85.72 101.28,-79.69
PE  (14 unrouted)
  Bottom 0.813: C4.2 -23.18,-10.79 -34.92,-10.79 R12.2 | R24.2 26.35,-10.79 38.1,-10.79 C10.2 | R2.2 R3.2 | R14.2 R15.2 | R27.2 R26.2 | R36.2 78.74,-10.79 90.49,-10.79 C15.2 | R48.2 -37.47,-64.77 -25.72,-64.77 C20.2 | R50.2 R51.2 | C25.2 34.92,-64.77 23.18,-64.77 R60.2 | R62.2 R63.2 | C30.1 98.74,-64.77 87,-64.77 R72.2 | R38.2 R39.2 R38.2
PE1
  Bottom 0.813: 39.69,-12.38 38.1,-10.79 26.35,-10.79 24.77,-12.38
PE2
  Bottom 0.813: 92.08,-12.38 90.49,-10.79 78.74,-10.79 77.15,-12.38
PE3
  Bottom 0.813: -24.13,-66.36 -25.72,-64.77 -37.47,-64.77 -39.05,-66.36
PE4
  Bottom 0.813: 36.51,-66.36 34.92,-64.77 23.18,-64.77 21.59,-66.36
PE5
  Bottom 0.813: 100.33,-66.36 98.74,-64.77 87,-64.77 85.41,-66.36